# EAGLE board arca_PCAD_2021-04-03.PCB (EAGLE 9.5.0)
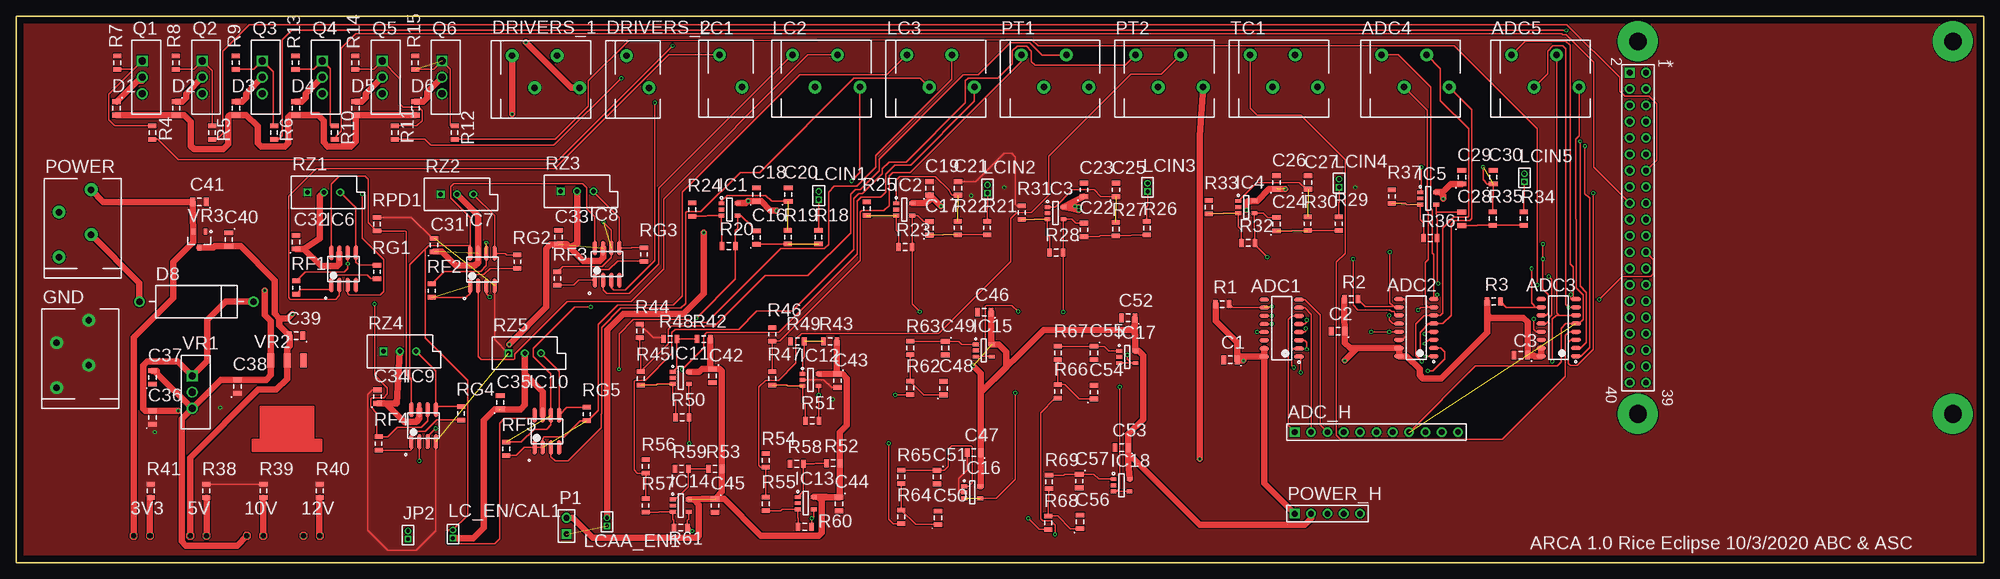
[diagram p0: board, top side]
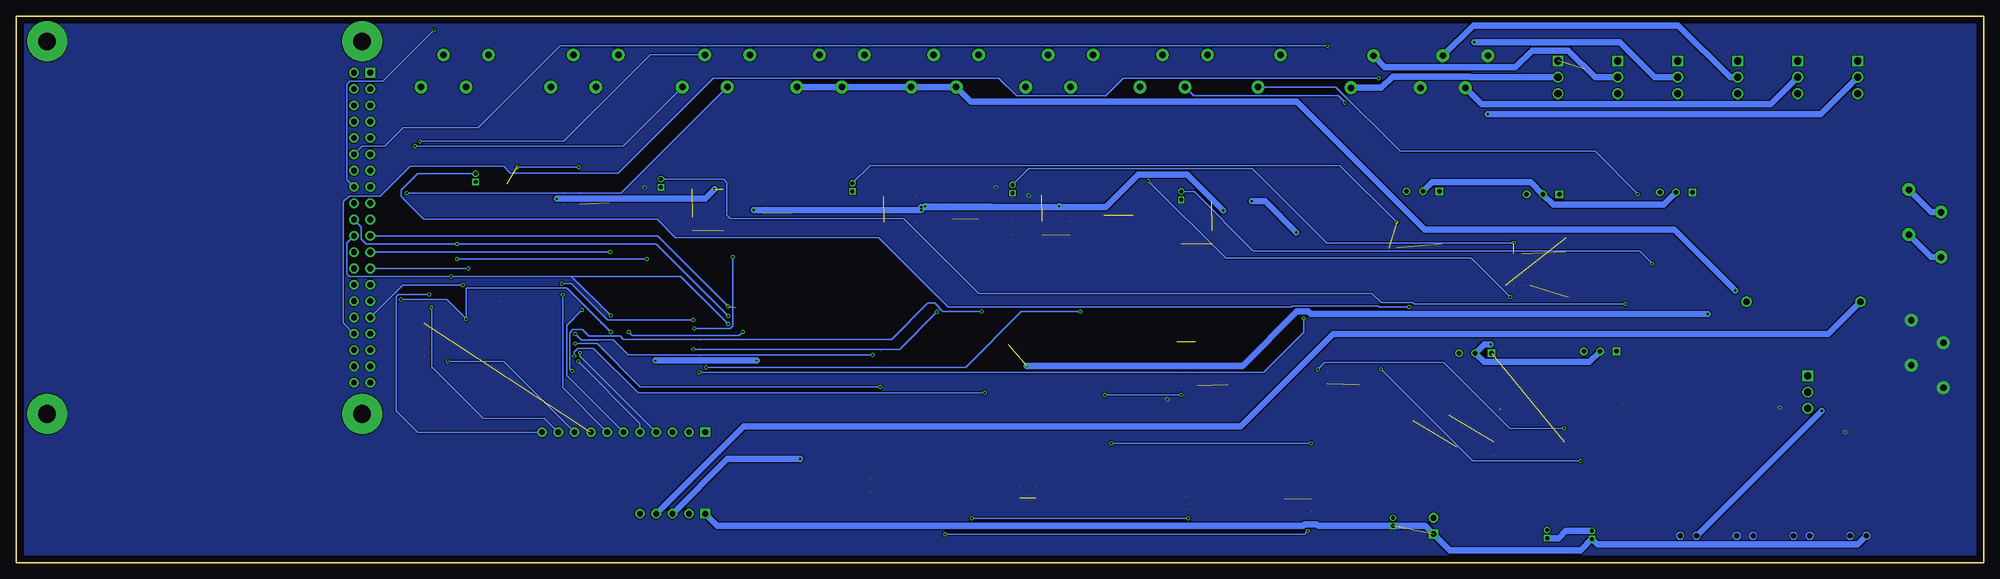
[diagram p1: board, bottom side, seen from below]

Size 306.07 x 85.09 mm. Coordinates in mm from the lower left corner, seen from the top.
Outline: 0,85.09 306.07,85.09 306.07,0 0,0 0,85.09
Copper layers (1*16): Top 0.035mm / dielectric 1.5mm / Bottom 0.035mm
Design rules "arca_PCAD_2021-04-03": minimum track width 6mil, minimum drill 0.35mm, track to track 6mil, track to pad 6mil, pad to pad 6mil, via to via 6mil, smd to smd 6mil, copper to edge 40mil, drill to drill 6mil, minimum pad ring 0mil, minimum via ring 0mil, stop-mask expansion 4mil, vias tented up to drill 0mil, thermal gap 10mil

## Footprints (pad centres in the part's own frame; a part is rotated, then mirrored left to right if it is on the bottom)
LED5MM_1PRIMARY = drill 0.813 pad 0.584 square: 1 -1.27,0; 2 1.27,0
LED5MM_4PRIMARY = drill 0.813 pad 0.584 square: 1 -1.27,0; 2 1.27,0
LED5MM_3PRIMARY = drill 0.813 pad 0.584 square: 1 -1.27,0; 2 1.27,0
LED5MM_2PRIMARY = drill 0.813 pad 0.584 square: 1 -1.27,0; 2 1.27,0
HDR2X20_1PRIMARY = drill 0.9 pad 1.5: 1 0,2.54; 3 2.54,2.54; 4 2.54,0; 5 5.08,2.54; 6 5.08,0; 7 7.62,2.54; 8 7.62,0; 9 10.16,2.54; 10 10.16,0; 11 12.7,2.54; 12 12.7,0; 13 15.24,2.54; 14 15.24,0; 15 17.78,2.54; 16 17.78,0; 17 20.32,2.54; 18 20.32,0; 19 22.86,2.54; 20 22.86,0; 21 25.4,2.54; 22 25.4,0; 23 27.94,2.54; 24 27.94,0; 25 30.48,2.54; 26 30.48,0; 27 33.02,2.54; 28 33.02,0; 29 35.56,2.54; 30 35.56,0; 31 38.1,2.54; 32 38.1,0; 33 40.64,2.54; 34 40.64,0; 35 43.18,2.54; 36 43.18,0; 37 45.72,2.54; 38 45.72,0; 39 48.26,2.54; 40 48.26,0 | drill 0.9 pad 1.5 square: 2 0,0
SOIC127P600X175-16N_1PRIMARY = smd 1.5 x 0.6: 1 -2.7,4.445; 2 -2.7,3.175; 3 -2.7,1.905; 4 -2.7,0.635; 5 -2.7,-0.635; 6 -2.7,-1.905; 7 -2.7,-3.175; 8 -2.7,-4.445; 9 2.7,-4.445; 10 2.7,-3.175; 11 2.7,-1.905; 12 2.7,-0.635; 13 2.7,0.635; 14 2.7,1.905; 15 2.7,3.175; 16 2.7,4.445
4PINCANCONNECTOR_1PRIMARY = drill 1 pad 2: 1 0,0; 2 -5,-3.5; 3 0,-7; 4 -5,-10.5
HDR1X11_1PRIMARY = drill 0.9 pad 1.5 square: 1 0,0 | drill 0.9 pad 1.5: 2 2.54,0; 3 5.08,0; 4 7.62,0; 5 10.16,0; 6 12.7,0; 7 15.24,0; 8 17.78,0; 9 20.32,0; 10 22.86,0; 11 25.4,0
CAPCP2012X06N_3PRIMARY = smd 0.75 x 1.35: 1 -1.05,0; 2 1.05,0
CAPCP2012X06N_16PRIMARY = smd 0.75 x 1.35: 1 -1.05,0; 2 1.05,0
CAPCP2012X06N_14PRIMARY = smd 0.75 x 1.35: 1 -1.05,0; 2 1.05,0
CAPCP2012X06N_15PRIMARY = smd 0.75 x 1.35: 1 -1.05,0; 2 1.05,0
CAPCP2012X06N_13PRIMARY = smd 0.75 x 1.35: 1 -1.05,0; 2 1.05,0
CAPCP2012X06N_11PRIMARY = smd 0.75 x 1.35: 1 -1.05,0; 2 1.05,0
CAPCP2012X06N_12PRIMARY = smd 0.75 x 1.35: 1 -1.05,0; 2 1.05,0
CAPCP2012X06N_2PRIMARY = smd 0.75 x 1.35: 1 -1.05,0; 2 1.05,0
CAPCP2012X06N_10PRIMARY = smd 0.75 x 1.35: 1 -1.05,0; 2 1.05,0
CAPCP2012X06N_9PRIMARY = smd 0.75 x 1.35: 1 -1.05,0; 2 1.05,0
CAPCP2012X06N_8PRIMARY = smd 0.75 x 1.35: 1 -1.05,0; 2 1.05,0
CAPCP2012X06N_7PRIMARY = smd 0.75 x 1.35: 1 -1.05,0; 2 1.05,0
CAPCP2012X06N_6PRIMARY = smd 0.75 x 1.35: 1 -1.05,0; 2 1.05,0
CAPCP2012X06N_1PRIMARY = smd 0.75 x 1.35: 1 -1.05,0; 2 1.05,0
CAPCP2012X06N_5PRIMARY = smd 0.75 x 1.35: 1 -1.05,0; 2 1.05,0
CAPCP2012X06N_4PRIMARY = smd 0.75 x 1.35: 1 -1.05,0; 2 1.05,0
DIOC2012X06N_1PRIMARY = smd 0.75 x 1.35: 1 -1.05,0; 2 1.05,0
DIODE-0.7_1PRIMARY = drill 1 pad 1.65: 1 -8.89,0; 2 8.89,0
2POS_GREEN_BOI_1PRIMARY = drill 1 pad 2: 1 -2.286,-3.226; 2 -7.286,-6.726
P:EX244Y244D1081 = drill 2.75 pad 6.2: 1 0,0
SOT95P245X110-5N_6PRIMARY = smd 0.9 x 0.6: 1 -1.25,0.95; 2 -1.25,0; 3 -1.25,-0.95; 4 1.25,-0.95; 5 1.25,0.95
SOT95P245X110-5N_7PRIMARY = smd 0.9 x 0.6: 1 -1.25,0.95; 2 -1.25,0; 3 -1.25,-0.95; 4 1.25,-0.95; 5 1.25,0.95
SOT95P245X110-5N_5PRIMARY = smd 0.9 x 0.6: 1 -1.25,0.95; 2 -1.25,0; 3 -1.25,-0.95; 4 1.25,-0.95; 5 1.25,0.95
SOIC127P1030X265-8N_1PRIMARY = smd 2.3 x 0.6: 1 -2.5,1.905; 2 -2.5,0.635; 3 -2.5,-0.635; 4 -2.5,-1.905; 5 2.5,-1.905; 6 2.5,-0.635; 7 2.5,0.635; 8 2.5,1.905
SOIC127P1030X265-8N_2PRIMARY = smd 2.3 x 0.6: 1 -2.5,1.905; 2 -2.5,0.635; 3 -2.5,-0.635; 4 -2.5,-1.905; 5 2.5,-1.905; 6 2.5,-0.635; 7 2.5,0.635; 8 2.5,1.905
SOT95P245X110-5N_4PRIMARY = smd 0.9 x 0.6: 1 -1.25,0.95; 2 -1.25,0; 3 -1.25,-0.95; 4 1.25,-0.95; 5 1.25,0.95
SOT95P245X110-5N_2PRIMARY = smd 0.9 x 0.6: 1 -1.25,0.95; 2 -1.25,0; 3 -1.25,-0.95; 4 1.25,-0.95; 5 1.25,0.95
SOT95P245X110-5N_3PRIMARY = smd 0.9 x 0.6: 1 -1.25,0.95; 2 -1.25,0; 3 -1.25,-0.95; 4 1.25,-0.95; 5 1.25,0.95
SOT95P245X110-5N_1PRIMARY = smd 0.9 x 0.6: 1 -1.25,0.95; 2 -1.25,0; 3 -1.25,-0.95; 4 1.25,-0.95; 5 1.25,0.95
MHDR1X2_4PRIMARY = drill 0.6 pad 1 square: 1 0,0 | drill 0.6 pad 1: 2 1.27,0
2POS_GREEN_BOI_2PRIMARY = drill 1 pad 2: 1 -2.286,-3.226; 2 -7.286,-6.726
4PINCANCONNECTOR_6PRIMARY = drill 1 pad 2: 1 0,0; 2 -5,-3.5; 3 0,-7; 4 -5,-10.5
4PINCANCONNECTOR_5PRIMARY = drill 1 pad 2: 1 0,0; 2 -5,-3.5; 3 0,-7; 4 -5,-10.5
MHDR1X2_3PRIMARY = drill 0.6 pad 1 square: 1 0,0 | drill 0.6 pad 1: 2 1.27,0
MHDR1X2_2PRIMARY = drill 0.6 pad 1 square: 1 0,0 | drill 0.6 pad 1: 2 1.27,0
MHDR1X2_1PRIMARY = drill 0.6 pad 1 square: 1 0,0 | drill 0.6 pad 1: 2 1.27,0
HDR1X2_1PRIMARY = drill 0.9 pad 1.5 square: 1 0,0 | drill 0.9 pad 1.5: 2 2.54,0
HDR1X5_1PRIMARY = drill 0.9 pad 1.5 square: 1 0,0 | drill 0.9 pad 1.5: 2 2.54,0; 3 5.08,0; 4 7.62,0; 5 10.16,0
4PINCANCONNECTOR_4PRIMARY = drill 1 pad 2: 1 0,0; 2 -5,-3.5; 3 0,-7; 4 -5,-10.5
4PINCANCONNECTOR_3PRIMARY = drill 1 pad 2: 1 0,0; 2 -5,-3.5; 3 0,-7; 4 -5,-10.5
UA78M_1PRIMARY = drill 1.1 pad 1.7 square: 1 2.667,2.84 | drill 1.1 pad 1.7: 2 0.127,2.84; 3 -2.413,2.84
RESC_0805_2012_6PRIMARY = smd 0.7 x 1.25: 1 -1.05,0; 2 1.05,0
RESC_0805_2012_8PRIMARY = smd 0.7 x 1.25: 1 -1.05,0; 2 1.05,0
RESC_0805_2012_1PRIMARY = smd 0.7 x 1.25: 1 -1.05,0; 2 1.05,0
RESC_0805_2012_17PRIMARY = smd 0.7 x 1.25: 1 -1.05,0; 2 1.05,0
RESC_0805_2012_11PRIMARY = smd 0.7 x 1.25: 1 -1.05,0; 2 1.05,0
RESC_0805_2012_16PRIMARY = smd 0.7 x 1.25: 1 -1.05,0; 2 1.05,0
RESC_0805_2012_15PRIMARY = smd 0.7 x 1.25: 1 -1.05,0; 2 1.05,0
RESC_0805_2012_14PRIMARY = smd 0.7 x 1.25: 1 -1.05,0; 2 1.05,0
RESC_0805_2012_2PRIMARY = smd 0.7 x 1.25: 1 -1.05,0; 2 1.05,0
RESC_0805_2012_13PRIMARY = smd 0.7 x 1.25: 1 -1.05,0; 2 1.05,0
RESC_0805_2012_12PRIMARY = smd 0.7 x 1.25: 1 -1.05,0; 2 1.05,0
RESC_0805_2012_10PRIMARY = smd 0.7 x 1.25: 1 -1.05,0; 2 1.05,0
RESC_0805_2012_9PRIMARY = smd 0.7 x 1.25: 1 -1.05,0; 2 1.05,0
RESC_0805_2012_7PRIMARY = smd 0.7 x 1.25: 1 -1.05,0; 2 1.05,0
RESC_0805_2012_4PRIMARY = smd 0.7 x 1.25: 1 -1.05,0; 2 1.05,0
RESC_0805_2012_5PRIMARY = smd 0.7 x 1.25: 1 -1.05,0; 2 1.05,0
RESC_0805_2012_3PRIMARY = smd 0.7 x 1.25: 1 -1.05,0; 2 1.05,0
VR5_2PRIMARY = drill 0.7 pad 1.2 square: 1 -2.54,0 | drill 0.7 pad 1.2: 2 0,0; 3 2.54,0
VR5_3PRIMARY = drill 0.7 pad 1.2 square: 1 -2.54,0 | drill 0.7 pad 1.2: 2 0,0; 3 2.54,0
VR5_1PRIMARY = drill 0.7 pad 1.2 square: 1 -2.54,0 | drill 0.7 pad 1.2: 2 0,0; 3 2.54,0
4PINCANCONNECTOR_2PRIMARY = drill 1 pad 2: 1 0,0; 2 -5,-3.5; 3 0,-7; 4 -5,-10.5
LM1084ISX-5.0/NOPB_1PRIMARY = smd 2.159 x 1.067: 1 0,-2.54; 2 0,0; 3 0,2.54
SOT95P245X110-3N_1PRIMARY = smd 0.9 x 0.6: 1 -1.25,0.95; 2 -1.25,-0.95; 3 1.25,0

## Placement (x,y rotation side)
3V3  LED5MM  [LED5MM_1PRIMARY]  19.56,4.19 0 top
5V  LED5MM  [LED5MM_4PRIMARY]  28.36,4.19 0 top
10V  LED5MM  [LED5MM_3PRIMARY]  37.17,4.19 0 top
12V  LED5MM  [LED5MM_2PRIMARY]  45.97,4.19 0 top
*  raspberry_pi  [HDR2X20_1PRIMARY]  250.98,76.28 270 top
ADC1  MCP3208  [SOIC127P600X175-16N_1PRIMARY]  196.85,36.51 180 top
ADC2  MCP3208  [SOIC127P600X175-16N_1PRIMARY]  217.81,36.58 180 top
ADC3  MCP3208  [SOIC127P600X175-16N_1PRIMARY]  239.9,36.58 180 top
ADC4  PTSA_1,5/_4-3,5-Z_-_1985218  [4PINCANCONNECTOR_1PRIMARY]  212.4,79.04 90 top
ADC5  PTSA_1,5/_4-3,5-Z_-_1985218  [4PINCANCONNECTOR_1PRIMARY]  232.59,79.04 90 top
ADC_H  Header_11  [HDR1X11_1PRIMARY]  198.88,20.32 0 top
C1  Cap  [CAPCP2012X06N_3PRIMARY]  188.87,31.57 180 top
C2  Cap  [CAPCP2012X06N_3PRIMARY]  205.63,36.02 180 top
C3  Cap  [CAPCP2012X06N_3PRIMARY]  234.04,32.28 180 top
C16  1nF  [CAPCP2012X06N_16PRIMARY]  115.15,50.62 90 top
C17  1nF  [CAPCP2012X06N_14PRIMARY]  142.08,52.07 90 top
C18  0.1UF  [CAPCP2012X06N_15PRIMARY]  115.15,57.31 90 top
C19  0.1UF  [CAPCP2012X06N_14PRIMARY]  142.08,58.29 90 top
C20  1nF  [CAPCP2012X06N_15PRIMARY]  120.11,57.31 90 top
C21  1nF  [CAPCP2012X06N_14PRIMARY]  146.52,58.29 90 top
C22  1nF  [CAPCP2012X06N_14PRIMARY]  166.08,51.82 90 top
C23  0.1UF  [CAPCP2012X06N_14PRIMARY]  166.08,58.04 90 top
C24  1nF  [CAPCP2012X06N_14PRIMARY]  196.05,52.7 90 top
C25  1nF  [CAPCP2012X06N_13PRIMARY]  171.1,58.04 90 top
C26  0.1UF  [CAPCP2012X06N_14PRIMARY]  196.05,59.18 90 top
C27  1nF  [CAPCP2012X06N_13PRIMARY]  200.94,59.18 90 top
C28  1nF  [CAPCP2012X06N_11PRIMARY]  224.86,53.53 90 top
C29  0.1UF  [CAPCP2012X06N_11PRIMARY]  224.86,60.01 90 top
C30  1nF  [CAPCP2012X06N_12PRIMARY]  229.75,60.01 90 top
C31  1UF  [CAPCP2012X06N_11PRIMARY]  65.02,49.45 90 top
C32  1UF  [CAPCP2012X06N_2PRIMARY]  43.56,49.91 90 top
C33  1UF  [CAPCP2012X06N_10PRIMARY]  84.36,50.69 90 top
C34  1UF  [CAPCP2012X06N_9PRIMARY]  56.23,25.84 90 top
C35  1UF  [CAPCP2012X06N_8PRIMARY]  75.31,24.95 90 top
C36  Cap  [CAPCP2012X06N_2PRIMARY]  21.21,22.61 90 top
C37  Cap  [CAPCP2012X06N_2PRIMARY]  21.21,28.83 90 top
C38  Cap  [CAPCP2012X06N_2PRIMARY]  34.42,27.43 90 top
C39  Cap  [CAPCP2012X06N_3PRIMARY]  43.56,35.31 180 top
C40  Cap  [CAPCP2012X06N_7PRIMARY]  33.08,50.31 270 top
C41  Cap  [CAPCP2012X06N_6PRIMARY]  28.51,56.15 180 top
C42  0.1UF  [CAPCP2012X06N_1PRIMARY]  108.33,29.08 270 top
C43  0.1UF  [CAPCP2012X06N_1PRIMARY]  127.76,28.32 270 top
C44  0.1UF  [CAPCP2012X06N_1PRIMARY]  128.02,9.14 270 top
C45  0.1UF  [CAPCP2012X06N_1PRIMARY]  108.71,8.89 270 top
C46  0.1UF  [CAPCP2012X06N_5PRIMARY]  150.59,38.99 180 top
C47  0.1UF  [CAPCP2012X06N_3PRIMARY]  148.97,17.14 180 top
C48  68nF  [CAPCP2012X06N_4PRIMARY]  144.27,27.14 90 top
C49  680pF  [CAPCP2012X06N_1PRIMARY]  144.53,33.4 270 top
C50  68nF  [CAPCP2012X06N_2PRIMARY]  143.38,6.99 90 top
C51  680pF  [CAPCP2012X06N_1PRIMARY]  143.26,13.34 270 top
C52  0.1UF  [CAPCP2012X06N_3PRIMARY]  172.97,38.1 180 top
C53  0.1UF  [CAPCP2012X06N_3PRIMARY]  171.96,17.91 180 top
C54  68nF  [CAPCP2012X06N_2PRIMARY]  167.64,26.54 90 top
C55  680pF  [CAPCP2012X06N_1PRIMARY]  167.64,32.64 270 top
C56  68nF  [CAPCP2012X06N_2PRIMARY]  165.48,6.35 90 top
C57  680pF  [CAPCP2012X06N_1PRIMARY]  165.35,12.7 270 top
D1  Diode  [DIOC2012X06N_1PRIMARY]  15.62,70.74 270 top
D2  Diode  [DIOC2012X06N_1PRIMARY]  24.92,70.74 270 top
D3  Diode  [DIOC2012X06N_1PRIMARY]  34.21,70.74 270 top
D4  Diode  [DIOC2012X06N_1PRIMARY]  43.51,70.74 270 top
D5  Diode  [DIOC2012X06N_1PRIMARY]  52.81,70.74 270 top
D6  Diode  [DIOC2012X06N_1PRIMARY]  62.1,70.74 270 top
D8  Diode  [DIODE-0.7_1PRIMARY]  28.07,40.64 0 top
DRIVERS_1  1991118  [4PINCANCONNECTOR_1PRIMARY]  77.14,78.91 90 top
DRIVERS_2  0  [2POS_GREEN_BOI_1PRIMARY]  91.72,81.2 90 top
DUMMY1  [P:EX244Y244D1081]  252.25,81.15 0 top
DUMMY2  [P:EX244Y244D1081]  252.25,23.15 0 top
DUMMY3  [P:EX244Y244D1081]  301.25,23.15 0 top
DUMMY4  [P:EX244Y244D1081]  301.25,81.15 0 top
GND  1991118  [4PINCANCONNECTOR_1PRIMARY]  6.3,27.23 180 top
IC1  LMV321LICTRT  [SOT95P245X110-5N_6PRIMARY]  110.96,54.99 0 top
IC2  LMV321LICTRT  [SOT95P245X110-5N_6PRIMARY]  138.14,54.99 0 top
IC3  LMV321LICTRT  [SOT95P245X110-5N_7PRIMARY]  161.66,54.42 0 top
IC4  LMV321LICTRT  [SOT95P245X110-5N_6PRIMARY]  191.36,55.37 0 top
IC5  LMV321LICTRT  [SOT95P245X110-5N_5PRIMARY]  219.66,56.71 0 top
IC6  MCP6N11R  [SOIC127P1030X265-8N_1PRIMARY]  50.93,45.72 90 top
IC7  MCP6N11R  [SOIC127P1030X265-8N_2PRIMARY]  72.52,45.64 90 top
IC8  MCP6N11R  [SOIC127P1030X265-8N_1PRIMARY]  91.95,46.48 90 top
IC9  MCP6N11R  [SOIC127P1030X265-8N_1PRIMARY]  63.37,21.34 90 top
IC10  MCP6N11R  [SOIC127P1030X265-8N_1PRIMARY]  82.55,20.45 90 top
IC11  LMV321LICTRT  [SOT95P245X110-5N_4PRIMARY]  103.4,28.77 0 top
IC12  LMV321LICTRT  [SOT95P245X110-5N_2PRIMARY]  123.57,28.45 0 top
IC13  LMV321LICTRT  [SOT95P245X110-5N_2PRIMARY]  122.81,9.27 0 top
IC14  LMV321LICTRT  [SOT95P245X110-5N_2PRIMARY]  103.38,8.89 0 top
IC15  LMV321LICTRT  [SOT95P245X110-5N_2PRIMARY]  150.5,33.02 0 top
IC16  LMV321LICTRT  [SOT95P245X110-5N_3PRIMARY]  148.72,10.96 0 top
IC17  LMV321LICTRT  [SOT95P245X110-5N_2PRIMARY]  172.85,32 0 top
IC18  LMV321LICTRT  [SOT95P245X110-5N_1PRIMARY]  171.94,12.06 0 top
JP2  PINHD-1X2  [MHDR1X2_4PRIMARY]  60.96,3.68 90 top
LC1  0  [2POS_GREEN_BOI_2PRIMARY]  106.18,81.33 90 top
LC2  1991118  [4PINCANCONNECTOR_6PRIMARY]  120.75,79.04 90 top
LC3  1991118  [4PINCANCONNECTOR_5PRIMARY]  138.55,79.04 90 top
LC_EN/CAL1  PINHD-1X2  [MHDR1X2_4PRIMARY]  67.94,3.81 90 top
LCAA_EN1  PINHD-1X2  [MHDR1X2_3PRIMARY]  91.91,5.71 90 top
LCIN1  PINHD-1X2  [MHDR1X2_4PRIMARY]  124.84,56.52 90 top
LCIN2  PINHD-1X2  [MHDR1X2_3PRIMARY]  151.1,57.53 90 top
LCIN3  PINHD-1X2  [MHDR1X2_3PRIMARY]  175.99,57.78 90 top
LCIN4  PINHD-1X2  [MHDR1X2_2PRIMARY]  205.78,58.44 90 top
LCIN5  PINHD-1X2  [MHDR1X2_1PRIMARY]  234.59,59.27 90 top
P1  Header_2  [HDR1X2_1PRIMARY]  85.6,4.45 90 top
POWER  1991118  [4PINCANCONNECTOR_1PRIMARY]  6.68,47.55 180 top
POWER_H  Header_5  [HDR1X5_1PRIMARY]  198.88,7.62 0 top
PT1  1991118  [4PINCANCONNECTOR_4PRIMARY]  156.35,79.04 90 top
PT2  1991118  [4PINCANCONNECTOR_3PRIMARY]  174.14,79.04 90 top
Q1  FQP30N06L-ND  [UA78M_1PRIMARY]  22.48,75.44 90 top
Q2  FQP30N06L-ND  [UA78M_1PRIMARY]  31.8,75.44 90 top
Q3  FQP30N06L-ND  [UA78M_1PRIMARY]  41.12,75.44 90 top
Q4  FQP30N06L-ND  [UA78M_1PRIMARY]  50.44,75.44 90 top
Q5  FQP30N06L-ND  [UA78M_1PRIMARY]  59.77,75.44 90 top
Q6  FQP30N06L-ND  [UA78M_1PRIMARY]  69.09,75.44 90 top
R1  Res1  [RESC_0805_2012_6PRIMARY]  187.63,40.23 180 top
R2  Res1  [RESC_0805_2012_6PRIMARY]  207.65,41.02 180 top
R3  Res1  [RESC_0805_2012_6PRIMARY]  229.84,40.64 180 top
R4  Res1  [RESC_0805_2012_8PRIMARY]  21.21,66.96 90 top
R5  Res1  [RESC_0805_2012_8PRIMARY]  30.48,66.96 90 top
R6  Res1  [RESC_0805_2012_8PRIMARY]  40.13,66.96 90 top
R7  Res1  [RESC_0805_2012_1PRIMARY]  15.75,77.85 270 top
R8  Res1  [RESC_0805_2012_17PRIMARY]  24.87,77.85 270 top
R9  Res1  [RESC_0805_2012_17PRIMARY]  34.16,77.85 270 top
R10  Res1  [RESC_0805_2012_8PRIMARY]  49.53,66.96 90 top
R11  Res1  [RESC_0805_2012_8PRIMARY]  58.93,66.96 90 top
R12  Res1  [RESC_0805_2012_8PRIMARY]  68.2,66.96 90 top
R13  Res1  [RESC_0805_2012_17PRIMARY]  43.46,77.85 270 top
R14  Res1  [RESC_0805_2012_17PRIMARY]  52.76,77.85 270 top
R15  Res1  [RESC_0805_2012_17PRIMARY]  62.05,77.85 270 top
R18  24.7K  [RESC_0805_2012_11PRIMARY]  124.81,50.67 90 top
R19  164K  [RESC_0805_2012_16PRIMARY]  120.05,50.67 270 top
R20  50.6K  [RESC_0805_2012_8PRIMARY]  110.84,49.28 180 top
R21  24.7K  [RESC_0805_2012_15PRIMARY]  151.02,52.12 90 top
R22  164K  [RESC_0805_2012_14PRIMARY]  146.46,52.12 270 top
R23  50.6K  [RESC_0805_2012_6PRIMARY]  138.3,49.15 180 top
R24  12.6K  [RESC_0805_2012_2PRIMARY]  105.16,54.99 90 top
R25  12.6K  [RESC_0805_2012_2PRIMARY]  132.33,55.12 90 top
R26  24.7K  [RESC_0805_2012_2PRIMARY]  175.9,52.07 90 top
R27  164K  [RESC_0805_2012_1PRIMARY]  171.07,51.94 270 top
R28  50.6K  [RESC_0805_2012_6PRIMARY]  161.8,48.26 180 top
R29  24.7K  [RESC_0805_2012_13PRIMARY]  205.71,52.76 90 top
R30  164K  [RESC_0805_2012_12PRIMARY]  200.88,52.76 270 top
R31  12.6K  [RESC_0805_2012_11PRIMARY]  156.43,54.48 90 top
R32  50.6K  [RESC_0805_2012_6PRIMARY]  191.64,49.78 180 top
R33  12.6K  [RESC_0805_2012_11PRIMARY]  185.51,55.37 90 top
R34  24.7K  [RESC_0805_2012_10PRIMARY]  234.51,53.58 90 top
R35  164K  [RESC_0805_2012_9PRIMARY]  229.69,53.58 270 top
R36  50.6K  [RESC_0805_2012_6PRIMARY]  219.96,50.55 180 top
R37  12.6K  [RESC_0805_2012_2PRIMARY]  214,57.02 90 top
R38  140  [RESC_0805_2012_2PRIMARY]  29.59,11.18 90 top
R39  470  [RESC_0805_2012_1PRIMARY]  38.48,11.18 270 top
R40  530  [RESC_0805_2012_1PRIMARY]  47.24,11.18 270 top
R41  39  [RESC_0805_2012_2PRIMARY]  20.95,11.18 90 top
R42  20K  [RESC_0805_2012_6PRIMARY]  106.93,34.8 180 top
R43  20K  [RESC_0805_2012_6PRIMARY]  126.62,34.42 180 top
R44  22  [RESC_0805_2012_1PRIMARY]  97.03,36.07 270 top
R45  20K  [RESC_0805_2012_2PRIMARY]  97.15,28.7 90 top
R46  22  [RESC_0805_2012_1PRIMARY]  117.6,35.56 270 top
R47  20K  [RESC_0805_2012_2PRIMARY]  117.6,28.7 90 top
R48  3K  [RESC_0805_2012_6PRIMARY]  101.73,34.8 180 top
R49  3K  [RESC_0805_2012_6PRIMARY]  121.54,34.42 180 top
R50  150K  [RESC_0805_2012_6PRIMARY]  103.63,22.61 180 top
R51  150K  [RESC_0805_2012_6PRIMARY]  123.82,22.1 180 top
R52  20K  [RESC_0805_2012_8PRIMARY]  127.09,15.49 180 top
R53  20K  [RESC_0805_2012_6PRIMARY]  108.71,14.61 180 top
R54  22  [RESC_0805_2012_7PRIMARY]  116.59,15.91 270 top
R55  20K  [RESC_0805_2012_2PRIMARY]  116.59,9.14 90 top
R56  22  [RESC_0805_2012_1PRIMARY]  97.92,14.99 270 top
R57  20K  [RESC_0805_2012_2PRIMARY]  97.92,8.89 90 top
R58  3K  [RESC_0805_2012_6PRIMARY]  121.41,15.37 180 top
R59  3K  [RESC_0805_2012_6PRIMARY]  103.5,14.61 180 top
R60  150K  [RESC_0805_2012_6PRIMARY]  122.68,5.59 180 top
R61  150K  [RESC_0805_2012_6PRIMARY]  103.38,5.46 180 top
R62  1.5K  [RESC_0805_2012_1PRIMARY]  139.06,27.18 270 top
R63  150K  [RESC_0805_2012_1PRIMARY]  139.06,33.4 270 top
R64  1.5K  [RESC_0805_2012_1PRIMARY]  137.67,7.11 270 top
R65  150K  [RESC_0805_2012_1PRIMARY]  137.67,13.34 270 top
R66  1.5K  [RESC_0805_2012_1PRIMARY]  162.05,26.67 270 top
R67  150K  [RESC_0805_2012_1PRIMARY]  162.05,32.64 270 top
R68  1.5K  [RESC_0805_2012_1PRIMARY]  160.53,6.22 270 top
R69  150K  [RESC_0805_2012_1PRIMARY]  160.65,12.57 270 top
RF1  20K  [RESC_0805_2012_1PRIMARY]  43.56,42.8 270 top
RF2  20K  [RESC_0805_2012_4PRIMARY]  64.64,42.34 270 top
RF3  20K  [RESC_0805_2012_1PRIMARY]  84.2,44.26 270 top
RF4  20K  [RESC_0805_2012_1PRIMARY]  56.39,18.54 270 top
RF5  20K  [RESC_0805_2012_5PRIMARY]  76.26,17.73 270 top
RG1  200  [RESC_0805_2012_1PRIMARY]  56.13,45.28 270 top
RG2  200  [RESC_0805_2012_4PRIMARY]  77.98,46.84 270 top
RG3  200  [RESC_0805_2012_1PRIMARY]  97.66,48.01 270 top
RG4  200  [RESC_0805_2012_1PRIMARY]  69.22,23.24 270 top
RG5  200  [RESC_0805_2012_3PRIMARY]  88.77,23.13 270 top
RPD1  20K  [RESC_0805_2012_2PRIMARY]  56.13,52.7 90 top
RZ1  RPot  [VR5_2PRIMARY]  47.88,57.66 0 top
RZ2  RPot  [VR5_3PRIMARY]  68.58,57.32 0 top
RZ3  RPot  [VR5_2PRIMARY]  87.25,57.78 0 top
RZ4  RPot  [VR5_2PRIMARY]  59.69,32.89 0 top
RZ5  RPot  [VR5_1PRIMARY]  79.12,32.59 0 top
TC1  1991118  [4PINCANCONNECTOR_2PRIMARY]  191.94,79.04 90 top
VR1  UA78M  [UA78M_1PRIMARY]  30.23,26.42 90 top
VR2  LM1084ISX-5.0/NOPB  [LM1084ISX-5.0/NOPB_1PRIMARY]  42.16,31.5 90 top
VR3  AP2210N-3.3TRG1  [SOT95P245X110-3N_1PRIMARY]  28.51,50.31 270 top

## Library data of the parts
3V3 5V 10V 12V * ADC1-ADC5 ADC_H C1-C3 C16-C57 D1-D6 D8 DRIVERS_1 DRIVERS_2 DUMMY1-DUMMY4 GND IC1-IC18 JP2 LC1-LC3 LC_EN/CAL1 LCAA_EN1 LCIN1-LCIN5 P1 POWER POWER_H PT1 PT2 Q1-Q6 R1-R15 R18-R69 RF1-RF5 RG1-RG5 RPD1 RZ1-RZ5 TC1 VR1-VR3 = arca_PCAD_2021-04-03

## Nets
+3V3: 3V3.1 C1.1 JP2.1 LCAA_EN1.1 P1.1
+3V3_LC: C31.1 C32.1 C33.1 C34.1 C35.1 IC6.7 IC7.7 IC8.7 IC9.7 IC10.7 JP2.2 LC_EN/CAL1.1 RZ1.2 RZ2.2 RZ3.2 RZ4.2 RZ5.2
+3V3_LCAA: C18.1 C19.1 C23.1 C26.1 C29.1 IC1.5 IC2.5 IC3.5 IC4.5 IC5.5 LCAA_EN1.2
+3V3_PT: C42.1 C43.1 C44.1 C45.1 IC11.5 IC12.5 IC13.5 IC14.5 P1.2 R42.1 R43.1 R52.1 R53.1
+5V: 5V.1 C39.2 C40.2 C46.1 C47.1 C52.1 C53.1 IC15.5 IC16.5 IC17.5 IC18.5 POWER_H.2 VR2.2 VR3.3
+10V: 10V.1 C37.2 C38.2 POWER_H.3 VR1.3
+12: D1.2 D2.2 D3.2 D4.2 D5.2 D6.2
ADC1_A5: ADC1.6 ADC_H.1
ADC1_A6: ADC1.7 ADC_H.2
ADC1_A7: ADC1.8 ADC_H.3
ADC1_CS: *.22 ADC1.10 R1.1
ADC2_A4: ADC2.5 ADC_H.4
ADC2_A5: ADC_H.5
ADC2_A6: ADC_H.6
ADC2_A7: ADC2.8 ADC_H.7
ADC2_CS: *.24 ADC2.10 R2.1
ADC3_A4: ADC3.5 ADC_H.8
ADC3_A5: ADC_H.9
ADC3_A6: ADC_H.10
ADC3_A7: ADC_H.11
ADC3_CS: *.26 ADC3.10 R3.1
CAL: IC6.8 IC7.8 IC8.8 IC9.8 IC10.8 LC_EN/CAL1.2 RPD1.1
DRIVER_1: *.11 R4.1
DRIVER_1_NEGATIVE: D1.1 Q1.2
DRIVER_2: *.13 R5.1
DRIVER_2_NEGATIVE: D2.1 Q2.2
DRIVER_3: *.15 R6.1
DRIVER_3_NEGATIVE: D3.1 Q3.2
DRIVER_4: *.18 R10.1
DRIVER_4_NEGATIVE: D4.1 Q4.2
DRIVER_5: *.33 R11.1
DRIVER_5_NEGATIVE: D5.1 DRIVERS_2.1 Q5.2
DRIVER_6: *.32 R12.1
DRIVER_6_NEGATIVE: D6.1 DRIVERS_2.2 Q6.2
GND: C36.1 C38.1 GND.1 GND.2 GND.3 GND.4 R38.2 R39.1 R40.1 R41.2
LC1: ADC1.1 C16.2 IC1.4 R20.1
LC1_OUT_N: IC6.2 LC1.1
LC1_OUT_P: IC6.3 LC1.2
LC1_PREC: IC6.6 LCIN1.2 RF1.1
LC2: ADC1.2 C17.2 IC2.4 R23.1
LC2_OUT_N: IC7.2
LC2_OUT_P: IC7.3
LC2_PREC: IC7.6 LCIN2.2 RF2.1
LC3: ADC1.3 C22.2 IC3.4 R28.1
LC3_OUT_N: IC8.2
LC3_OUT_P: IC8.3
LC3_PREC: IC8.6 LCIN3.2 RF3.1
LC4: ADC1.4 C24.2 IC4.4 R32.1
LC4_OUT_N: IC9.2
LC4_OUT_P: IC9.3
LC4_PREC: IC9.6 LCIN4.2 RF4.1
LC5: ADC1.5 C28.2 IC5.4 R36.1
LC5_OUT_N: IC10.1 IC10.2 RF5.2 RG5.2
LC5_OUT_P: IC10.3
LC5_PREC: IC10.6 LCIN5.2 RF5.1
MISO: *.21 ADC1.12 ADC2.12 ADC3.12
MOSI: *.19 ADC1.11 ADC2.11 ADC3.11
NET3V3_K: 3V3.2 R41.1
NET5V_K: 5V.2 R38.1
NET10V_K: 10V.2 R39.2
NET12V_A: 12V.1 C36.2 D8.2 VR1.1
NET12V_K: 12V.2 R40.2
NETC16_1: C16.1 R18.1 R19.2
NETC17_1: C17.1 R21.1 R22.2
NETC20_1: C20.1 IC1.1 R19.1
NETC21_1: C21.1 IC2.1 R22.1
NETC22_1: C22.1 R26.1 R27.2
NETC24_1: C24.1 R29.1 R30.2
NETC25_1: C25.1 IC3.1 R27.1
NETC27_1: C27.1 IC4.1 R30.1
NETC28_1: C28.1 R34.1 R35.2
NETC30_1: C30.1 IC5.1 R35.1
NETC48_1: C48.1 R62.1 R63.2
NETC49_1: C49.1 IC15.1 R63.1
NETC50_1: C50.1 R64.1 R65.2
NETC51_1: C51.1 IC16.1 R65.1
NETC54_1: C54.1 R66.1 R67.2
NETC55_1: C55.1 IC17.1 R67.1
NETC56_1: C56.1 R68.1 R69.2
NETC57_1: C57.1 IC18.1 R69.1
NETIC1_3: IC1.3 R20.2 R24.1
NETIC2_3: IC2.3 R23.2 R25.1
NETIC3_3: IC3.3 R28.2 R31.1
NETIC4_3: IC4.3 R32.2 R33.1
NETIC5_3: IC5.3 R36.2 R37.1
NETIC6_1: IC6.1 RF1.2 RG1.2
NETIC6_5: IC6.5 RG1.1 RZ1.3
NETIC7_1: IC7.1 RF2.2 RG2.2
NETIC7_5: IC7.5 RG2.1 RZ2.3
NETIC8_1: IC8.1 RF3.2 RG3.2
NETIC8_5: IC8.5 RG3.1 RZ3.3
NETIC9_1: IC9.1 RF4.2 RG4.2
NETIC9_5: IC9.5 RG4.1 RZ4.3
NETIC10_5: IC10.5 RG5.1 RZ5.3
NETIC11_1: IC11.1 R42.2 R48.1
NETIC11_3: IC11.3 R45.1 R50.2
NETIC12_1: IC12.1 R43.2 R49.1
NETIC12_3: IC12.3 R47.1 R51.2
NETIC13_1: IC13.1 R52.2 R58.1
NETIC13_3: IC13.3 R55.1 R60.2
NETIC14_1: IC14.1 R53.2 R59.1
NETIC14_3: IC14.3 R57.1 R61.2
NETLCIN1_1: LCIN1.1 R18.2
NETLCIN2_1: LCIN2.1 R21.2
NETLCIN3_1: LCIN3.1 R26.2
NETLCIN4_1: LCIN4.1 R29.2
NETLCIN5_1: LCIN5.1 R34.2
NETQ1_1: Q1.1 R4.2 R7.2
NETQ2_1: Q2.1 R5.2 R8.2
NETQ3_1: Q3.1 R6.2 R9.2
NETQ4_1: Q4.1 R10.2 R13.2
NETQ5_1: Q5.1 R11.2 R14.2
NETQ6_1: Q6.1 R12.2 R15.2
PT1: ADC2.1 IC16.3 IC16.4
PT1_OUT: R44.2 R45.2
PT1_PREC: IC11.4 R50.1 R64.2
PT2: ADC2.2 IC15.3 IC15.4
PT2_OUT: R46.2 R47.2
PT2_PREC: IC12.4 R51.1 R62.2
PT3: ADC2.3 IC18.3 IC18.4
PT3_OUT: R54.2 R55.2
PT3_PREC: IC13.4 R60.1 R68.2
PT4: ADC2.4 IC17.3 IC17.4
PT4_OUT: R56.2 R57.2
PT4_PREC: IC14.4 R61.1 R66.2
SCK: *.23 ADC1.13 ADC2.13 ADC3.13
TC1: ADC3.1
TC2: ADC3.2

## Tracks (layer width: path | path; a pad name or v marks a point on that pad's centre or on a via)
+3V3  (via drill 0.3 pad 0.6)  (3 unrouted)
  Top 1: 228.79,38.67 228.79,35.83 221.67,28.7 218.81,28.7 218.31,29.21 218.31,30.13 216.31,32.13 215.1,32.13 215.1,33.4 208.59,33.4 | 208.59,33.4 207.52,33.4 206.68,34.24 206.68,36.02 206.59,38.59 206.59,41.02 | 194.13,32.07 194.13,12.37 198.88,7.62 | 189.92,32.07 194.13,32.07 | v190.91,31.45 189.92,31.45 C1.1 189.92,32.07 | 189.92,32.07 189.92,34.25 186.58,37.59 186.58,40.23 | 11.68,58.05 13.58,56.15 27.46,56.15 27.46,53.95 27.56,51.56 27.56,49.91 24.43,46.79 24.43,41.2 18.29,35.05 3V3.1 | v206.63,31.45 208.59,33.4 | 228.79,38.67 229.36,38.1 234.44,38.1 235.09,37.46 235.09,32.28 236.07,32.28 236.22,32.13 237.2,32.13 237.2,33.4 | 228.79,38.67 228.79,40.64 | 194.13,32.07 194.15,32.07 194.15,33.34
  Bottom 1: 11.68,58.05 8.18,54.55 6.68,54.55 | v190.91,31.45 v206.63,31.45 | 198.88,7.62 196.98,5.71 105.89,5.71 105.62,5.99 103.78,5.99 103.51,5.71 86.87,5.71 P1.1 83.06,1.91 62.74,1.91 JP2.1 60.12,2.85 19.63,2.85 3V3.1
+3V3_LC  (via drill 0.3 pad 0.6)  (6 unrouted)
  Top 1: v76.68,33.96 82.5,39.78 82.5,48.92 83.08,49.51 84.23,49.51 C33.1 | 75.14,23.9 74.47,23.9 72.72,22.15 72.72,5.41 71.14,3.83 67.96,3.83 LC_EN/CAL1.1 | C35.1 78.49,23.9 79.12,24.53 79.12,29.35 | 86.08,49.1 86.72,48.47 88.19,46.99 90.81,46.99 91.31,47.5 IC8.7 | 86.08,49.1 85.55,49.63 C33.1 | 79.12,29.35 RZ5.2 | C34.1 57.53,24.79 | 57.53,24.79 59.18,24.79 RZ4.2 | C32.1 44.76,48.86 | 44.76,48.86 47.27,50.44 47.27,57.05 RZ1.2 | C33.1 86.08,49.1 | 87.25,49.68 RZ3.2 | IC10.7 81.92,26.55 79.12,29.35 | C31.1 66.22,48.4 68.39,46.23 71.37,46.23 71.88,46.74 71.88,54.02 RZ2.2 | 44.76,48.86 47.47,46.14 49.95,46.14 50.29,46.48 IC6.7 | 57.53,24.79 60.4,21.92 62.23,21.92 62.74,22.43 IC9.7
  Top 1.016: 86.08,49.1 87.25,49.68
  Bottom 1: v76.68,33.96 77.75,33.96 RZ5.2 77.75,31.22 61.37,31.22 RZ4.2 | RZ3.2 85.8,59.23 70.49,59.23 RZ2.2 66.98,55.73 49.81,55.73 RZ1.2 | LC_EN/CAL1.1 66.17,3.81 65.02,4.95 JP2.2
+3V3_LCAA  (via drill 0.3 pad 0.6)  (5 unrouted)
  Top 1: 221.45,57.66 221.87,57.66 223.17,58.96 C29.1 | C23.1 164.37,56.12 IC3.5 | v165.28,54.89 165.18,54.91 164.6,55.03 IC3.5 | 164.79,55.37 v165.28,54.89 | IC3.5 164.79,55.37 | C19.1 142.09,56.55 141.48,55.94 IC2.5 | v164.69,55.47 164.79,55.37 | C19.1 v143.86,55.47 | C19.1 | v118.31,54.84 117.3,54.84 115.88,56.26 C18.1 v113.87,56.26 113.83,56.26 113.51,55.94 IC1.5 | v165.28,54.89 v165.28,55.37 | v106.96,51.41 106.96,41.91 103.78,38.73 94.46,38.73 91.97,36.24 91.97,22.31 91.91,22.26 LCAA_EN1.2 | v191.36,54.89 191.36,56.04 191.64,56.32 IC4.5 193.06,56.32 194.87,58.13 v197.41,58.13 | v221.96,56.64 221.96,57.15 221.45,57.66 | IC5.5 221.45,57.66
  Bottom 1: v165.28,54.89 v191.36,54.89 | 143.86,55.37 136.58,55.37 131.51,60.44 123.91,60.44 v118.31,54.84 | 143.86,55.37 v165.28,55.37 | 143.86,55.37 v164.69,55.47 | 143.86,55.37 | 143.86,55.37 v143.86,55.47 | v113.87,56.26 111.81,56.26 v106.96,51.41 | v197.41,58.13 198.9,56.64 v221.96,56.64
+3V3_PT  (3 unrouted)
  Top 1: 127.67,29.37 R43.1 | 127.67,29.37 C43.1 128.54,29.37 129.21,28.7 129.21,21.36 128.14,20.3 R52.1 128.14,10.19 C44.1 126.04,10.19 126.01,10.22 124.71,10.22 | 127.67,29.37 126.29,29.37 126.26,29.4 IC12.5 | IC13.5 124.71,10.22 | 107.98,30.13 R42.1 | 107.98,30.13 106.69,30.13 106.27,29.72 IC11.5 | 107.98,30.13 C42.1 109.47,30.13 109.76,29.84 R53.1 109.76,10.99 C45.1 | C45.1 106.7,9.94 IC14.5 105.41,9.84 106.21,9.04 106.21,4.17 105.92,3.87 89.72,3.87 86.61,6.99 P1.2 | 124.71,10.22 125.27,9.66 125.27,4.62 124.84,4.19 115.86,4.19 110.11,9.94 C45.1
+5V  (via drill 0.3 pad 0.6)  (6 unrouted)
  Top 1: 40.97,38.04 42.28,38.04 v42.98,38.74 | 40.97,38.04 40.97,36.9 42.51,35.36 C39.2 42.55,35.27 42.55,33.71 42.2,33.36 42.2,31.53 VR2.2 42.14,31.47 42.14,28.63 40.45,26.94 37.69,26.94 27.09,16.35 5V.1 | 40.97,38.04 40.23,38.78 40.23,43.95 34.92,49.26 C40.2 30.88,49.26 30.68,49.06 VR3.3 | 174.02,36.83 174.02,35.56 174.1,35.48 IC17.5 174.62,32.95 175.31,32.26 175.31,22.32 173.01,20.02 C53.1 173.01,17.02 | 174.02,36.83 C52.1 | C46.1 151.64,33.97 152.81,33.97 153.97,32.8 153.97,30.43 150.02,26.48 | 150.02,26.47 C47.1 150.02,11.91 IC16.5 | 150.02,26.47 150.02,26.48 | 150.02,26.48 150.02,29.45 v148.84,30.63 | 173.01,17.02 173.01,15.55 IC18.5 | 173.01,17.02 184.13,5.89 200.41,5.89 201.42,6.91 POWER_H.2 | 174.02,36.83 173.44,36.25 159.8,36.25 150.02,26.47
  Bottom 1: v148.84,30.63 115.31,30.63 106.84,39.1 105.1,39.1 104.74,38.74 v42.98,38.74
+10V  (via drill 0.3 pad 0.6)  (3 unrouted)
  Top 1: v38.66,42.34 38.66,38.56 39.62,37.59 39.62,29.21 38.9,28.48 C38.2 31.86,28.48 VR1.3 | v184.12,16.13 184.12,66.45 184.64,74.04 | 10V.1 34.38,2.67 26.36,2.67 25.73,3.3 25.73,22.35 VR1.3 | C37.2 21.9,29.88 21.9,29.49 VR1.3
  Bottom 1: v38.66,42.34 48.18,51.87 86.97,51.87 106.88,71.78 157.58,71.78 159.85,74.04 184.64,74.04 | POWER_H.3 195.45,16.13 v184.12,16.13
+12
  Top 1: D6.2 D5.2 52.81,65.53 52.07,64.8 48.51,64.8 47.88,65.43 47.88,68.83 47.02,69.69 D4.2 42.66,69.69 42.32,69.34 42.32,65.28 41.78,64.75 38.1,64.75 37.57,65.28 37.57,67.94 35.81,69.69 D3.2 33.27,69.69 33.02,69.44 33.02,65.13 32.26,64.36 27.69,64.36 27.18,64.87 27.18,68.67 26.16,69.69 D2.2 D1.2
+12V  (2 unrouted)
  Top 1: 19.18,40.64 19.18,43.56 11.68,51.05
  Bottom 1: 19.18,40.64 24.18,35.64 101.19,35.64 115.62,21.21 192.91,21.21 206.5,7.62 | 11.68,51.05 8.18,47.55 6.68,47.55
ADC1_A5  (1 unrouted)
  Top 0.254: ADC1.6 198.37,38.42 197.84,37.88 197.84,21.36 ADC_H.1
ADC1_A6  (2 unrouted)
  Top 0.254: ADC1.7 200.41,39.69 201.42,38.67 ADC_H.2
ADC1_A7  (2 unrouted)
  Top 0.254: ADC1.8 200.41,40.96 202.82,38.54 202.82,21.46 ADC_H.3
ADC1_CS  (via drill 0.3 pad 0.6)  (1 unrouted)
  Top 0.254: v195.3,39.88 195.11,39.69 189.23,39.69 R1.1
  Bottom 0.254: *.22 206.3,50.88 v195.3,39.88
ADC2_A4  (via drill 0.3 pad 0.6)  (1 unrouted)
  Top 0.254: v218.36,32.69 218.36,35.87 219.71,37.21 ADC2.5 221.9,37.21 223.19,38.5 223.19,52.65 223.8,53.26 226.1,53.26 226.43,53.59 226.43,70.51 222.9,74.04
  Bottom 0.254: ADC_H.4 218.36,32.18 v218.36,32.69
ADC2_A5  (via drill 0.3 pad 0.6)
  Top 0.254: 219.4,79.04 221.51,76.93 221.51,71.96 225.92,67.55 225.92,53.98 225.77,53.83 223.6,53.83 221.89,52.12 221.89,38.86 221.51,38.48 219.04,38.48 217.68,37.13 217.68,32.26 v218.63,31.31
  Bottom 0.254: ADC_H.5 209.04,21.72 v218.63,31.31
ADC2_A6  (via drill 0.3 pad 0.6)  (1 unrouted)
  Top 0.254: 219.71,39.75 218.49,39.75 v218.06,39.32 | 219.71,39.75 220.5,39.75 | 215.9,74.04 219.52,70.42 219.52,54.71 219.66,54.57 219.66,47.22 219.2,46.76 219.2,40.26 219.71,39.75
  Bottom 0.254: ADC_H.6 220.44,29.18 220.44,36.94 v218.06,39.32
ADC2_A7  (via drill 0.3 pad 0.6)  (1 unrouted)
  Top 0.254: v221.06,41.71 221.06,41.02 ADC2.8 220.5,41.02 220.5,47.95 220.27,48.18 220.27,54.89 220.03,55.13 220.03,74 214.99,79.04 212.4,79.04
  Bottom 0.254: v221.06,41.71 221.06,27.25 ADC_H.7
ADC2_CS  (via drill 0.3 pad 0.6)  (1 unrouted)
  Top 0.254: 214.49,39.75 214.29,39.9 209.82,39.9 R2.1 | 214.49,39.75 ADC2.10 | 214.49,39.75 213.66,40.39 v213.66,48.34
  Bottom 0.254: v213.66,48.34 *.24
ADC3_A4  (1 unrouted)
  Top 0.254: ADC_H.8 226.95,30.61 239.67,30.61 240.31,31.24 240.31,36.47 241.05,37.21 243.05,37.21 243.73,37.89 243.73,41.71 242.7,42.74 242.57,64.13 242.57,65.93 243.09,66.45 243.09,74.04
ADC3_A5  (via drill 0.3 pad 0.6)  (1 unrouted)
  Top 0.254: v238.94,31.32 238.94,37.9 239.52,38.48 240,38.48 | 240,38.48 242.6,38.48 | 240,38.48 239.59,38.89 239.59,79.04
  Bottom 0.254: ADC_H.9 230.2,31.32 v238.94,31.32
ADC3_A6  (via drill 0.3 pad 0.6)  (1 unrouted)
  Top 0.254: 242.6,39.75 v241.45,39.75 241,40.21 241,80.01 240.56,80.44 239.01,80.44 238.2,79.63 238.2,76.15 236.09,74.04
  Bottom 0.254: v241.45,39.75 241.45,30.5 233.43,22.48 223.9,22.48 ADC_H.10
ADC3_A7  (via drill 0.3 pad 0.6)  (1 unrouted)
  Top 0.254: v241.83,41.73 241.83,41.02 242.16,41.02 | 242.16,41.02 242.16,46.02 241.71,46.48 241.71,80.54 241.05,81.2 234.76,81.2 232.59,79.04 | 242.16,41.02 242.6,41.02
  Bottom 0.254: ADC_H.11 243.61,20.32 246.91,23.62 246.91,41.45 246.63,41.73 v241.83,41.73
ADC3_CS  (via drill 0.3 pad 0.6)  (1 unrouted)
  Top 0.254: 236.35,39.75 231.78,39.75 R3.1 | 236.35,39.75 ADC3.10 | 236.35,39.75 235.71,40.39 v235.71,45.8
  Bottom 0.254: v235.71,45.8 *.26
CAL  (1 unrouted)
  Top 0.254: 70.61,49.35 70.61,53.7 67.59,56.72 67.59,58.57 68.05,59.03 88.14,59.03 88.8,58.37 88.8,55.12 90.04,53.87 IC8.8 | 70.61,49.35 64.16,49.35 63.63,48.82 | 63.63,48.82 61.24,46.43 61.24,28.83 61.47,28.6 61.47,28.42 | IC9.8 61.47,28.42 | IC7.8 70.61,49.35 | 63.63,48.82 63.63,34.95 70.23,28.35 70.23,7.37 LC_EN/CAL1.2 67.31,5.08 67.06,4.83 67.06,3.05 67.18,2.92 74.42,2.92 75.23,3.73 75.23,21.72 75.95,22.43 80.64,22.43 IC10.8 | IC6.8 49.02,58.95 50.27,60.2 54.3,60.2 54.81,59.69 54.81,52.98 RPD1.1 60.55,51.66 60.68,51.53 60.68,29.21 61.47,28.42
DRIVER_1  (via drill 0.3 pad 0.6)  (1 unrouted)
  Top 0.254: R4.1 22.05,65.91 25.22,62.74 84.4,62.74 v102.11,80.44
  Bottom 0.254: v102.11,80.44 221.41,80.44 234.16,67.69 245.87,67.69 248.72,64.85 252.25,64.85 *.11
DRIVER_1_NEGATIVE  (via drill 0.3 pad 0.6)
  Top 1: v77.14,69.85 77.14,78.91 | Q1.2 19.64,75.06 18.89,75.06 D1.1
  Bottom 1: Q1.2 25.35,69.85 v77.14,69.85
DRIVER_2  (1 unrouted)
  Top 0.254: R5.1 31.24,65.91 32.13,66.8 32.13,79.65 36.25,83.77 241.17,83.77 249.4,75.54 249.4,73.38 250.19,72.59 254,72.59 255.17,71.42 255.17,62.69 *.13
DRIVER_2_NEGATIVE
  Top 1: Q2.2 26.44,73.05 26.44,72.39 25.84,71.79 D2.1
  Bottom 1: 80.64,73.91 78.13,71.4 33.13,71.4 Q2.2
DRIVER_3  (via drill 0.3 pad 0.6)  (1 unrouted)
  Top 0.254: v241.1,82.86 42.85,82.86 41.43,81.43 41.43,66.45 40.89,65.91 R6.1
  Bottom 0.254: *.15 254.66,59.64 254.66,74.42 254.15,74.93 249.02,74.93 v241.1,82.86
DRIVER_3_NEGATIVE
  Top 1: Q3.2 35.76,73.05 35.76,72.39 35.16,71.79 D3.1
  Bottom 1: Q3.2 39.47,75.56 47.52,83.62 79.44,83.62 84.14,78.91
DRIVER_4
  Top 0.254: R10.1 49.81,65.91 49.81,66.4 50.57,67.16 50.57,80.06 52.86,82.35 240.41,82.35 240.59,82.17 241.12,82.17 245.39,77.9 245.39,61.54 *.18
DRIVER_4_NEGATIVE  (via drill 0.3 pad 0.6)
  Top 1: 87.64,73.91 86.39,73.91 v79.3,81 | Q4.2 45.06,73.02 45.06,72.39 44.46,71.79 D4.1
  Bottom 1: v79.3,81 56.62,81 51.18,75.56 Q4.2
DRIVER_5  (via drill 0.3 pad 0.6)  (1 unrouted)
  Top 0.254: v94.11,75.44 83.64,64.97 64.49,64.97 63.55,65.91 R11.1
  Bottom 0.254: *.33 255.17,37.29 255.17,56.19 254.25,57.1 249.43,57.1 244.78,61.75 230.25,61.75 229.18,60.68 212.4,60.68 197.64,75.44 153.2,75.44 150.42,72.66 136.61,72.66 133.83,75.44 v94.11,75.44
DRIVER_5_NEGATIVE  (1 unrouted)
  Top 1: Q5.2 54.38,73.02 54.38,72.39 53.78,71.79 D5.1
  Bottom 1: Q5.2 60.48,75.56 64.64,79.73 70.28,79.73 72.87,77.14 93.17,77.14 DRIVERS_2.1
DRIVER_6  (via drill 0.3 pad 0.6)
  Top 0.254: v236.6,43.2 236.6,67.59 223.72,80.47 158.95,80.47 157.98,81.44 153.95,81.44 95.28,81.28 89.03,75.03 89.03,71.09 83.84,65.91 R12.1
  Bottom 0.254: *.32 245.95,43.2 v236.6,43.2
DRIVER_6_NEGATIVE  (2 unrouted)
  Top 1: Q6.2 63.96,73.27 63.96,72.39 63.36,71.79 D6.1
  Bottom 1: DRIVERS_2.2 93.7,73.91 91.95,75.67 79.91,75.67 79.81,75.56 Q6.2
GND  (via drill 0.3 pad 0.6)  (2 unrouted)
  Top 0.254: 74.42,43.14 74.42,34.75 76.58,32.59 | 100.68,34.8 100.68,35.05 99.09,35.05 97.03,37.12 | 56.23,26.89 55.37,26.89 54.67,26.18 54.67,5.02 57.78,1.91 62.23,1.91 65.28,4.95 65.28,18.84 | 127.76,27.27 126.83,27.27 125.65,28.45 122.32,28.45 | 146.52,59.34 149.26,59.34 153.67,63.75 154.84,63.75 155.44,63.15 155.44,55.8 155.7,55.53 156.43,55.53 | 65.02,50.5 64.72,50.5 61.46,53.76 56.13,53.76 | 147.92,17.14 147.92,14.42 146.63,13.13 146.63,11.13 146.81,10.96 147.47,10.96 | 215.1,34.67 215.62,34.67 216.26,35.31 216.26,40.66 215.9,41.02 215.1,41.02 | R38.2 R39.1
  other vias: 31.75,24.13 21.59,20.32 127,25.4 148.59,57.15 153.67,58.42 208.28,58.42
  pour Top (no thermals): 0.38,84.96 304.93,84.96 304.93,0.22 305.18,-0.04 0.38,-0.04
  pour Bottom (no thermals): 0.38,84.96 305.18,84.96 305.18,0 0.38,0
LC1  (via drill 0.3 pad 0.6)  (1 unrouted)
  Top 0.254: v199.8,29.59 199.8,32.07 ADC1.1 | v105.79,38.05 111.89,44.15 R20.1 111.89,51.66 112.21,51.99 IC1.4 112.75,54.04 114.43,52.37 114.43,51.67 C16.2
  Bottom 0.254: v105.79,38.05 105.79,35.81 112.01,29.59 v199.8,29.59
LC1_OUT_N
  Top 0.254: IC6.2 50.29,41.58 49.71,41 42.67,41 42.42,41.25 42.42,57.05 46.69,61.32 83.8,61.32 101.52,79.04 LC1.1
LC1_OUT_P  (via drill 0.3 pad 0.6)
  Top 0.254: IC6.3 51.56,41.94 51.82,41.68 56.64,41.68 57.15,42.19 57.15,47.19 53.82,50.52 v53.82,57.4
  Bottom 0.254: v53.82,57.4 60.48,64.06 90.81,64.06 100.79,74.04 LC1.2
LC1_PREC  (via drill 0.3 pad 0.6)
  Top 0.254: IC6.6 v51.56,46.53 51.56,45.77 51.05,45.26 44.98,45.26 RF1.1
  Bottom 0.254: v51.56,46.53 53.57,48.54 113.61,48.54 122.86,57.78 LCIN1.2
LC2  (via drill 0.3 pad 0.6)  (2 unrouted)
  Top 0.254: v140.54,39.06 139.35,40.25 R23.1 139.35,51.56 139.39,51.6 IC2.4 140.26,54.04 141.18,53.12 C17.2 | v198.75,30.38 198.4,30.73 198.4,33.02 198.72,33.34 ADC1.2
  Bottom 0.254: v140.54,39.06 149.71,39.06 158.39,30.38 v198.75,30.38
LC2_OUT_N  (1 unrouted)
  Top 0.254: 127.75,79.04 123.16,79.04 100.74,56.62 100.74,45.7 95.67,40.63 85.7,40.63 77.57,32.49 77.57,31.75 77.42,31.6 72.39,31.6 71.88,32.11 IC7.2
LC2_OUT_P  (via drill 0.3 pad 0.6)  (1 unrouted)
  Top 0.254: 131.25,74.04 131.25,60.69 v129.95,59.38 | v73.69,41.38 73.15,41.91 IC7.3
  Bottom 0.254: v129.95,59.38 117.96,47.4 79.7,47.4 v73.69,41.38
LC2_PREC  (via drill 0.3 pad 0.6)  (2 unrouted)
  Top 0.254: v73.15,49.78 73.15,46.24 72.26,45.35 66.6,45.35 RF2.1
  Bottom 0.254: LCIN2.2 148.58,61.32 113.77,61.32 102.23,49.78 v73.15,49.78
LC3  (via drill 0.3 pad 0.6)  (2 unrouted)
  Top 0.254: ADC1.3 200.42,34.61 200.74,34.29 v200.74,33.22 | v162.85,39.01 R28.1 162.85,50.83 162.91,50.88 IC3.4 164.19,53.47 164.79,52.87 C22.2
  Bottom 0.254: v200.74,33.22 168.63,33.22 v162.85,39.01
LC3_OUT_N  (1 unrouted)
  Top 0.254: 120.75,79.04 99.99,58.28 99.99,46.51 95.37,41.88 91.85,41.88 91.31,42.42 IC8.2
LC3_OUT_P  (via drill 0.3 pad 0.6)  (1 unrouted)
  Top 0.254: v99.36,71.6 99.36,47.04 94.77,42.44 92.96,42.44 92.58,42.82 IC8.3
  Bottom 0.254: 124.25,74.04 122.87,72.66 100.42,72.66 v99.36,71.6
LC3_PREC  (via drill 0.3 pad 0.6)  (1 unrouted)
  Top 0.254: v91.36,53.01 92.58,51.79 92.58,47.51 91.19,46.11 85,46.11 RF3.1
  Bottom 0.254: v91.36,53.01 100.18,61.83 173.22,61.83 LCIN3.2
LC4  (via drill 0.3 pad 0.6)  (2 unrouted)
  Top 0.254: ADC1.4 200.42,35.88 200.61,36.07 v200.61,36.45 | v194.62,47.58 192.69,49.51 R32.1 192.69,52.05 192.6,52.13 IC4.4 193.98,54.42 194.65,53.76 C24.2
  Bottom 0.254: v200.61,36.45 195,36.45 194.62,36.83 v194.62,47.58
LC4_OUT_N  (via drill 0.3 pad 0.6)
  Top 0.254: v62.74,15.85 IC9.2 | v93.78,30.12 93.78,35.61 96.01,37.85 104.53,37.85 105.01,37.37 107.42,37.37 118.92,48.87 125.74,48.87 126.37,49.5 126.37,57.72 127.25,58.61 130.75,58.61 133.72,61.59 133.72,63.4 145.55,75.22 145.55,79.04
  Bottom 0.254: v62.74,15.85 79.5,15.85 v93.78,30.12
LC4_OUT_P  (via drill 0.3 pad 0.6)
  Top 0.254: IC9.3 64.01,19.68 v65.25,20.93 | v103.61,30.07 106.93,33.4 106.93,35.31 107.44,35.81 118.62,35.81 130.82,48.02 130.82,56.26 131.48,56.92 134.51,56.92 135.25,57.66 135.25,60.45 136.67,61.87 139.12,61.87 149.05,71.81 149.05,74.04
  Bottom 0.254: v65.25,20.93 73.79,20.93 84,31.14 102.54,31.14 v103.61,30.07
LC4_PREC  (via drill 0.3 pad 0.6)  (1 unrouted)
  Top 0.254: v55.75,40.28 55.75,29.21 57.76,27.2 57.76,26.29 57.15,25.68 55.35,25.68 55.17,25.51 55.17,24.23 56.13,23.27 56.13,19.59 RF4.1 57.84,19.59 59.27,21.03 62.99,21.03 64.01,22.05 IC9.6
  Bottom 0.254: v55.75,40.28 88.61,40.28 88.81,40.48 93.77,40.48 95.22,41.94 156.36,41.94 168.02,53.59 195,53.59 195.5,54.1 195.5,59.18 196.04,59.72 LCIN4.2
LC5  (via drill 0.3 pad 0.6)  (2 unrouted)
  Top 0.254: v221.18,43.46 221.01,43.63 R36.1 221.01,53.19 220.91,54.58 | v200.74,37.77 200.74,37.48 200.41,37.15 ADC1.5 | 220.91,54.58 IC5.4 | 220.91,54.58 C28.2
  Bottom 0.254: v221.18,43.46 219.71,43.46 214.03,37.77 v200.74,37.77
LC5_OUT_N  (2 unrouted)
  Top 0.254: 138.55,79.04 135.44,75.93 121.9,75.93 103.64,57.67 103.64,41.55 102.21,40.12 93.58,40.12 90.58,37.12 90.58,23.7 88.95,22.08 87.76,22.08 85.24,19.56 82.17,19.56 81.92,19.3 IC10.2 IC10.1 79.06,17.95 77.8,16.68 RF5.2
LC5_OUT_P  (1 unrouted)
  Top 0.254: IC10.3 83.19,16.51 83.84,15.85 85.9,15.85 91.03,20.98 91.03,23.14 91.08,23.19 91.08,36.65 94.04,39.61 103.38,39.61 104.15,40.38 104.15,54.48 104.34,54.67 106.53,54.67 112.61,60.76 115.64,60.76 130.3,75.42 140.67,75.42 142.05,74.04
LC5_PREC  (via drill 0.3 pad 0.6)  (3 unrouted)
  Top 0.254: v89.36,39.8 86.92,39.8 80.47,33.35 80.47,32.13 83.19,29.41 83.19,21.41 82.55,20.78 80.59,20.78 78.6,18.78 RF5.1
  Bottom 0.254: v89.36,39.8 94.03,39.8 94.21,39.98 107.57,39.98 107.73,39.83 161.09,39.83 171.91,50.65 203.53,50.65 206.38,53.49 242.65,53.49 246.13,56.97 246.13,57.99 243.57,60.54 LCIN5.2
MISO  (via drill 0.3 pad 0.6)  (3 unrouted)
  Top 0.254: ADC3.12 238,37.21 238.38,37.59 238.38,38.1 238.84,38.56 238.84,44.09 v238.38,44.55 | v213.59,38.46 213.59,37.74 214.12,37.21 ADC2.12 | ADC1.12 v195.3,37.15
  Bottom 0.254: 219.69,44.55 202.71,44.55 v195.3,37.15 | 219.69,44.55 v238.38,44.55 254.25,44.55 254.66,44.96 254.66,49.73 *.21 | v213.59,38.46 219.69,44.55
MOSI  (via drill 0.3 pad 0.6)  (3 unrouted)
  Top 0.254: v237.49,49.61 v237.49,47.3 237.49,42.57 238.33,41.73 238.33,38.84 237.98,38.48 ADC3.11 | v207.95,47.3 207.95,40.13 208.71,39.37 213.66,39.37 213.97,39.06 214.38,39.06 214.5,38.48 ADC2.11 | ADC1.11 v195.3,38.42
  Bottom 0.254: *.19 252.37,52.27 252.37,50.39 251.59,49.61 v237.49,49.61 206.49,49.61 v195.3,38.42 | v207.95,47.3 v237.49,47.3
NET3V3_K
  Top 1: 3V3.2 20.83,10.13 R41.1
NET5V_K  (1 unrouted)
  Top 1: 5V.2 29.63,10.13 R38.1
NET10V_K  (1 unrouted)
  Top 1: 10V.2 38.44,10.13 R39.2
NET12V_A  (via drill 0.3 pad 0.6)
  Top 1: D8.2 32.61,40.64 29.72,37.74 29.72,31.41 VR1.1 25.12,31.34 20.37,31.34 19.76,30.73 19.76,23.96 20.07,23.66 C36.2 v25.24,23.66
  Bottom 1: v25.24,23.66 12V.1
NET12V_K
  Top 1: R40.2 47.14,10.02 47.14,4.47 47.16,4.46 47.16,4.28 12V.2
NETC16_1  (2 unrouted)
  Top 0.254: C16.1 117.55,49.57 117.6,49.62 R18.1
NETC17_1  (3 unrouted)
  Top 0.254: R21.1 144.27,51.07 144.22,51.02 C17.1
NETC20_1  (2 unrouted)
  Top 0.254: IC1.1 109.71,56.27 110.59,57.15 116.63,57.15 117.52,56.26 C20.1 120.11,54.01 120.05,53.95 R19.1
NETC21_1  (3 unrouted)
  Top 0.254: IC2.1 136.88,59.59 137.41,60.12 143,60.12 145.03,58.09 145.54,57.24 C21.1 146.52,55.23 146.46,55.17 R22.1
NETC22_1  (1 unrouted)
  Top 0.254: C22.1 168.5,50.77 168.63,50.89 R27.2 173.41,50.89 173.53,51.02 R26.1
NETC24_1  (3 unrouted)
  Top 0.254: C24.1 198.43,51.66 198.47,51.7 R29.1
NETC25_1  (2 unrouted)
  Top 0.254: IC3.1 161.59,55.37 164.26,58.04 167.66,58.04 168.72,56.99 C25.1 171.1,54.99 171.07,54.97 R27.1
NETC27_1  (3 unrouted)
  Top 0.254: IC4.1 190.48,56.32 190.48,56.64 193,59.16 199.61,59.16 200.63,58.13 C27.1 200.94,55.99 200.88,55.93 R30.1
NETC28_1
  Top 0.254: C28.1 227.23,52.48 227.28,52.53 R35.2 R34.1
NETC30_1  (via drill 0.3 pad 0.6)  (2 unrouted)
  Top 0.254: v218.57,61.57 218.57,57.66 IC5.1 | v228.17,61.57 228.17,59.65 228.85,58.96 C30.1 229.75,56.81 229.69,56.74 R35.1
  Bottom 0.254: v218.57,61.57 v228.17,61.57
NETC48_1
  Top 0.254: C48.1 141.2,26.09 R62.1 R63.2
NETC49_1  (1 unrouted)
  Top 0.254: R63.1 C49.1 146.63,34.45 147.12,33.97 IC15.1
NETC50_1
  Top 0.254: C50.1 139.9,5.93 R64.1 R65.2
NETC51_1  (1 unrouted)
  Top 0.254: IC16.1 148.15,11.91 148.69,12.45 148.69,18.03 148.51,18.21 145.54,18.21 144.98,17.65 144.98,14.99 144.38,14.38 C51.1 R65.1
NETC54_1
  Top 0.254: C54.1 165.36,25.49 163.14,27.72 R66.1 R67.2
NETC55_1  (1 unrouted)
  Top 0.254: R67.1 C55.1 169.24,33.69 169.97,32.95 IC17.1
NETC56_1
  Top 0.254: C56.1 163.97,5.3 162,7.27 R68.1 160.53,9.32 160.66,9.45 R69.2
NETC57_1
  Top 0.254: IC18.1 168.38,13.02 167.64,13.75 C57.1 163.07,13.75 162.94,13.62 R69.1
NETIC1_3
  Top 0.254: R24.1 107.37,53.94 107.47,54.04 IC1.3 109.71,51.69 109.79,51.61 R20.2
NETIC2_3  (2 unrouted)
  Top 0.254: R23.2 137.25,51.41 136.89,51.77 IC2.3 134.62,54.04 134.59,54.07 R25.1
NETIC3_3  (2 unrouted)
  Top 0.254: R28.2 160.75,50.67 160.41,51.01 IC3.3 158.43,53.47 158.39,53.43 R31.1
NETIC4_3  (2 unrouted)
  Top 0.254: R32.2 190.59,51.84 190.1,52.33 IC4.3 187.86,54.42 187.76,54.32 R33.1
NETIC5_3  (1 unrouted)
  Top 0.254: R36.2 218.91,52.88 218.41,53.39 IC5.3 216.29,55.76 216.08,55.97 R37.1
NETIC6_1
  Top 0.254: RG1.2 55.15,44.23 54.62,44.76 49.4,44.76 49.02,44.38 IC6.1 49.02,42.49 44.31,42.49 RF1.2
NETIC6_5
  Top 0.254: RG1.1 53.34,46.33 52.83,46.84 IC6.5 52.83,55.24 RZ1.3
NETIC7_1  (1 unrouted)
  Top 0.254: RG2.2 73.72,45.79 72.76,44.84 71,44.84 70.61,44.45 70.61,41.94 69.97,41.29 RF2.2
NETIC7_5  (1 unrouted)
  Top 0.254: RZ2.3 74.42,54.02 IC7.5 76.07,48.14 76.32,47.89 RG2.1
NETIC8_1
  Top 0.254: RG3.2 93.55,46.96 92.19,45.6 90.42,45.6 90.04,45.22 IC8.1 87.49,43.98 86.72,43.21 RF3.2
NETIC8_5
  Top 0.254: RZ3.3 93.85,53.72 IC8.5 95.71,48.98 95.78,49.06 RG3.1
NETIC9_1
  Top 0.254: RG4.2 65.4,22.19 63.63,20.42 61.52,20.42 61.47,20.37 IC9.1 61.47,17.62 61.34,17.49 RF4.2
NETIC9_5
  Top 0.254: RZ4.3 65.28,29.84 IC9.5 65.73,24.29 RG4.1
NETIC10_5  (1 unrouted)
  Top 0.254: RG5.1 85.69,24.18 IC10.5 84.45,29.8 RZ5.3
NETIC11_1  (1 unrouted)
  Top 0.254: IC11.1 102.78,30.35 R48.1 R42.2
NETIC11_3  (1 unrouted)
  Top 0.254: R50.2 102.58,24.99 102.15,25.43 IC11.3 99.73,27.82 99.57,27.65 R45.1
NETIC12_1  (2 unrouted)
  Top 0.254: IC12.1 122.32,31.75 122.59,32.02 R49.1 R43.2
NETIC12_3  (1 unrouted)
  Top 0.254: R51.2 122.78,24.56 122.32,25.02 IC12.3 120.02,27.5 119.86,27.65 R47.1
NETIC13_1
  Top 0.254: IC13.1 122.46,11.12 R58.1 124.18,15.37 124.31,15.49 R52.2
NETIC13_3
  Top 0.254: R55.1 118.95,8.09 119.17,8.32 IC13.3 121.56,6.98 121.63,6.91 R60.2
NETIC14_1
  Top 0.254: IC14.1 102.56,9.84 104.56,11.84 R59.1 R53.2
NETIC14_3
  Top 0.254: R57.1 99.95,7.84 100.05,7.94 IC14.3 102.13,6.78 102.33,6.58 R61.2
NETLCIN1_1  (1 unrouted)
  Top 0.254: LCIN1.1 124.84,54.14 124.81,54.1 R18.2
NETLCIN2_1  (2 unrouted)
  Top 0.254: LCIN2.1 151.1,55.37 151.02,55.3 R21.2
NETLCIN3_1
  Top 0.254: LCIN3.1 175.99,55.49 175.9,55.4 R26.2
NETLCIN4_1  (2 unrouted)
  Top 0.254: LCIN4.1 205.78,56.16 205.71,56.08 R29.2
NETLCIN5_1  (1 unrouted)
  Top 0.254: LCIN5.1 234.59,56.97 234.51,56.9 R34.2
NETQ1_1
  Top 0.254: 18.34,76.8 14.44,72.91 14.44,68.95 15.38,68.01 R4.2 | R7.2 18.34,76.8 | 18.34,76.8 Q1.1
NETQ2_1
  Top 0.254: R8.2 27.66,76.8 Q2.1 30.48,76.59 R5.2
NETQ3_1
  Top 0.254: R9.2 36.98,76.8 Q3.1 39.98,76.41 39.98,68.01 R6.2
NETQ4_1
  Top 0.254: R13.2 46.3,76.8 Q4.1 48.84,76.86 48.84,68.01 R10.2
NETQ5_1
  Top 0.254: R11.2 62.35,68.01 63.17,68.83 63.17,70.36 62.62,70.91 60.2,70.91 59.68,71.42 59.68,75.35 Q5.1 55.62,76.8 R14.2
NETQ6_1  (1 unrouted)
  Top 0.254: R15.2 64.94,76.8 Q6.1 67.56,76.79 67.56,68.01 R12.2
PT1  (via drill 0.3 pad 0.6)  (2 unrouted)
  Top 0.254: v219.25,32.13 ADC2.1 | v155.42,26.42 155.42,12.95 152.47,10.01 IC16.3
  Bottom 0.254: v219.25,32.13 219.25,32.82 218.69,33.38 216.28,33.38 209.32,26.42 v155.42,26.42
PT1_OUT
  Top 0.254: 163.35,79.04 163.35,79.02 159.59,79.02 157.68,80.93 154.62,80.93 149.62,75.93 147.32,75.93 134.23,62.84 134.23,61.02 131.31,58.1 130.56,58.1 129.8,57.35 129.8,51.34 123.14,44.68 116.51,44.68 108.66,36.83 101.93,36.83 101.42,36.32 101.42,34.02 R45.2 97.16,32.31 97.03,32.44 R44.2
PT1_PREC  (via drill 0.3 pad 0.6)
  Top 0.254: v104.68,18.59 R50.1 104.68,25.17 104.65,25.2 IC11.4 | v135.74,18.59 135.74,6.72 136.4,6.06 R64.2
  Bottom 0.254: v104.68,18.59 v135.74,18.59
PT2  (via drill 0.3 pad 0.6)  (2 unrouted)
  Top 0.254: 151.13,32.07 IC15.4 | ADC2.2 221.59,33.4 222.22,32.77 222.22,31.75 220.32,29.84 v219.58,29.84 | v155.85,39.09 154.89,40.06 150.88,40.06 150.75,39.93 150.75,32.45 151.13,32.07 | IC15.3 151.13,32.07
  Bottom 0.254: v219.58,29.84 219.93,30.2 219.93,35.79 219.46,36.27 218.01,36.27 216.99,35.26 212.12,35.26 211.61,34.75 169.88,34.75 164.24,40.39 163.22,40.39 161.93,39.09 v155.85,39.09
PT2_OUT
  Top 0.254: 156.35,79.04 156.35,78.01 139.04,60.71 136.32,60.71 135.81,60.2 135.81,55.63 134.99,54.8 131.52,54.8 131.33,54.61 131.33,47.02 118.81,34.51 R46.2 R47.2
PT2_PREC  (via drill 0.3 pad 0.6)  (2 unrouted)
  Top 0.254: IC12.4 v124.82,26.13 124.82,23.29 R51.1 | v136.74,26.13 R62.2
  Bottom 0.254: v124.82,26.13 v136.74,26.13
PT3  (via drill 0.3 pad 0.6)  (1 unrouted)
  Top 0.254: ADC2.3 219.71,34.67 v219.13,34.09 | v171.68,27.36 171.68,11.58 171.21,11.12 | IC18.3 171.21,11.12 | 171.21,11.12 IC18.4
  Bottom 0.254: v219.13,34.09 215.7,34.09 208.97,27.36 v171.68,27.36
PT3_OUT
  Top 0.254: 181.14,79.04 178.12,76.02 173.35,76.02 160.6,63.27 160.6,57.23 157.86,54.48 155.63,54.48 154.74,53.59 154.74,46.91 143.53,35.71 122.17,35.71 121.26,34.8 121.26,31.06 118.59,28.4 116.59,28.4 115.52,27.33 115.52,15.16 115.82,14.86 R54.2 R55.2
PT3_PREC  (via drill 0.3 pad 0.6)  (1 unrouted)
  Top 0.254: 123.73,6.78 124.06,7.11 IC13.4 | 123.73,6.78 v123.73,6.88 | R60.1 123.73,6.78 | v157.43,6.88 159.14,5.17 R68.2
  Bottom 0.254: v123.73,6.88 v157.43,6.88
PT4  (via drill 0.3 pad 0.6)  (1 unrouted)
  Top 0.254: 173.48,31.05 IC17.4 | 173.48,31.05 172.85,31.69 v172.85,32.33 | v219.07,35.59 219.43,35.94 ADC2.4 | IC17.3 173.48,31.05
  Bottom 0.254: v172.85,32.33 210.82,32.33 213.16,34.67 218.16,34.67 v219.07,35.59
PT4_OUT
  Top 0.254: 174.14,79.04 172.52,77.42 158.49,77.42 157.93,77.98 157.93,79.65 157.17,80.42 155.7,80.42 154.97,79.69 154.97,77.7 152.69,75.42 148.08,75.42 147.67,75.01 147.67,71.57 138.48,62.38 135.81,62.38 134.74,61.31 134.74,60.57 131.6,57.43 131.06,57.43 130.31,56.68 130.31,48.73 120.73,39.14 115.24,39.14 112.42,36.32 102.51,36.32 102.01,35.81 102.01,32.56 97.84,28.4 96.27,28.4 96.14,28.27 96.14,14.43 96.63,13.94 R56.2 R57.2
PT4_PREC  (via drill 0.3 pad 0.6)  (1 unrouted)
  Top 0.254: v105.16,4.93 104.85,5.23 104.85,5.46 R61.1 104.43,6.58 104.63,6.78 IC14.4 | v161.59,4.42 161.59,5.84 160.93,6.5 159.69,6.5 159.33,6.86 159.33,23.33 161.62,25.62 R66.2
  Bottom 0.254: v105.16,4.93 105.31,4.93 105.31,4.78 105.66,4.42 v161.59,4.42
SCK  (via drill 0.3 pad 0.6)  (3 unrouted)
  Top 0.254: ADC2.13 v213.59,35.94 v210.77,35.94 | v193.01,35.94 193.08,35.88 ADC1.13 | ADC3.13 236.45,35.94 236.07,36.32 v236.07,37.92 | *.23 254.66,47.19 254.66,44.93 254.25,44.53 249.81,44.53 v246.23,40.95
  Bottom 0.254: v210.77,35.94 210.22,35.4 193.56,35.4 v193.01,35.94 | v213.59,35.94 220.42,42.77 236.07,42.77 v236.07,37.92 239.09,40.95 v246.23,40.95
TC1  (via drill 0.3 pad 0.6)  (1 unrouted)
  Top 0.254: v244.02,64.85 244.02,57.46 244.75,56.73 244.75,33.52 243.36,32.13 ADC3.1
  Bottom 0.254: 202.44,74.04 211.63,64.85 v244.02,64.85
TC2  (via drill 0.3 pad 0.6)  (1 unrouted)
  Top 0.254: v243.26,65.58 243.26,43.05 244.24,42.07 244.24,34.29 243.35,33.4 ADC3.2
  Bottom 0.254: 198.94,79.04 207.45,79.04 220.9,65.58 v243.26,65.58
TC3  (via drill 0.3 pad 0.6)
  Top 0.254: 242.6,34.67 241.81,34.67 241.45,34.31 241.45,30.99 241.76,30.68 242.8,30.68 245.29,33.17 v245.29,57.56
  Bottom 0.254: v245.29,57.56 211.92,57.56 195.44,74.04
TC4
  Top 0.254: 242.6,35.94 241.55,35.94 240.94,35.33 240.94,28.96 231.16,19.18 205.99,19.18 205.36,19.81 205.36,46.79 206.73,48.16 206.73,62.76 199.82,69.67 193.04,69.67 191.94,70.77 191.94,79.04

## Text on the board
tPlace: ARCA 1.0 Rice Eclipse 10/3/2020 ABC & ASC